# Altium PCB PCB1.PcbDoc
Units mil, origin at the board's own origin, x right, y up, seen from the top; angles counter-clockwise.
Board outline 6000 x 4000 mil, 2 copper layers (Top Layer, Bottom Layer); 16 components, 51 nets, 160 pads, 0 vias.
Unrouted connection lines stored in the file: 113.
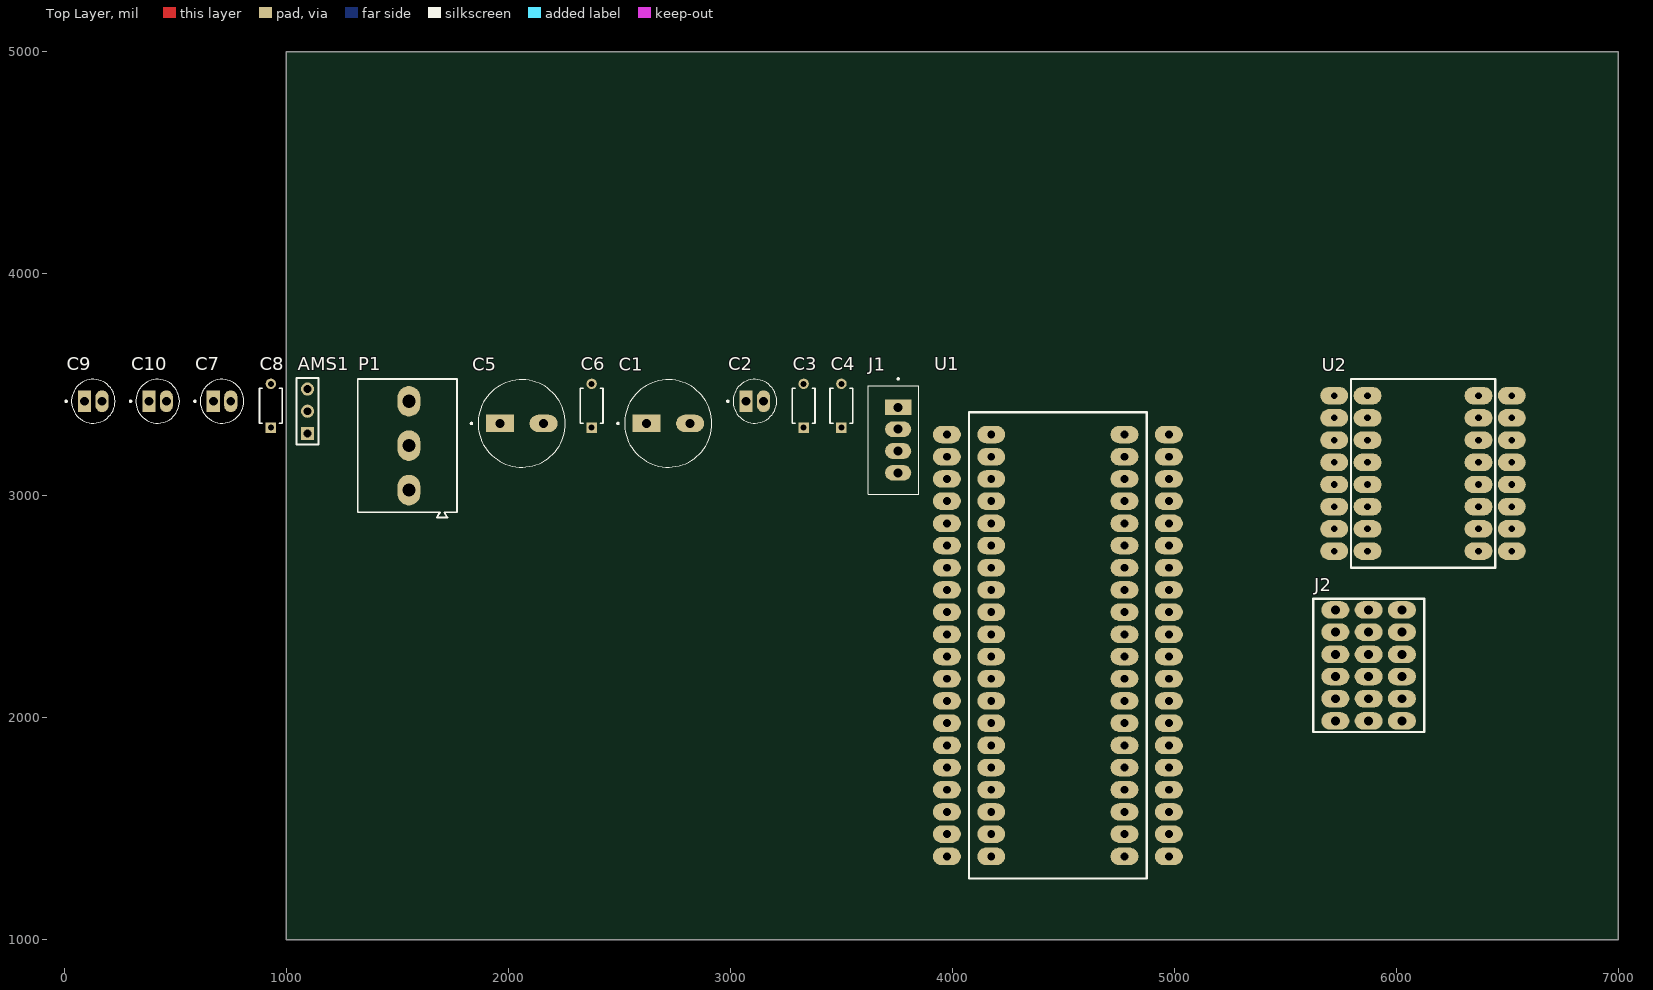
[diagram p0: Top Layer view]
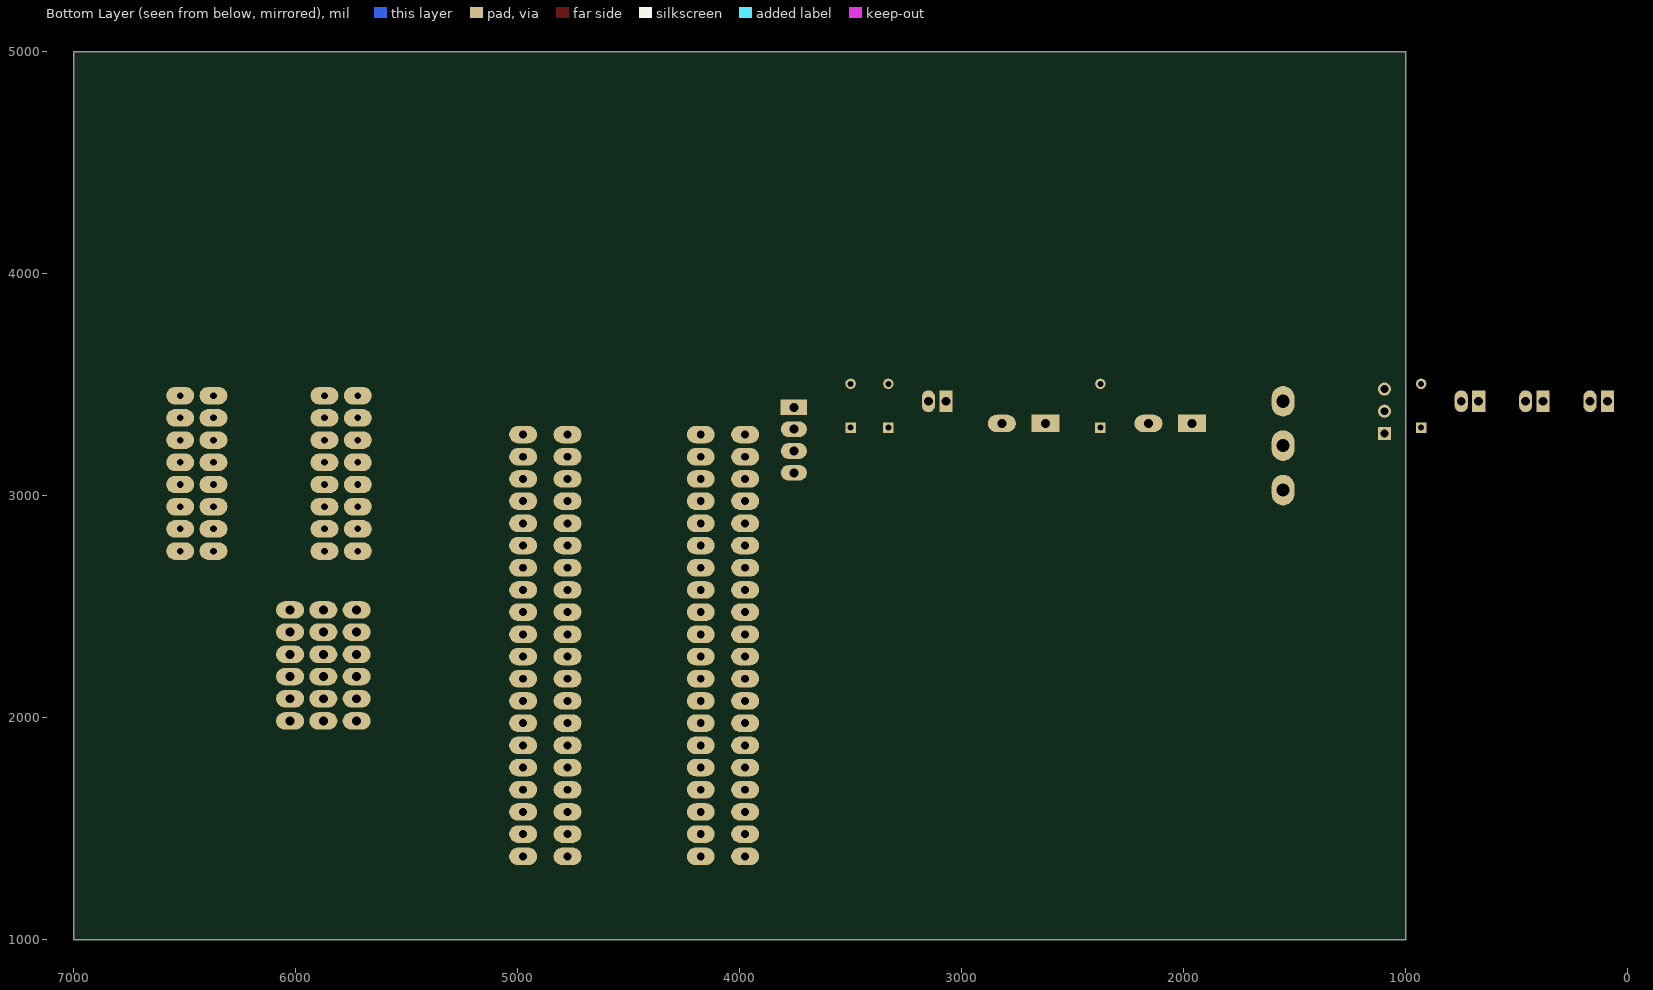
[diagram p1: Bottom Layer view, seen from below]

## Layer stack, top to bottom
Top Solder: solder mask 0.4, Solder Resist, Dk 3.5
Top Layer: signal copper 1.4
Dielectric 1: dielectric 12.6, FR-4, Dk 4.8
Bottom Layer: signal copper 1.4
Bottom Solder: solder mask 0.4, Solder Resist, Dk 3.5

## Board outline
1000,1000 7000,1000 7000,5000 1000,5000

## Design rules (kind name [scope] priority, off if disabled: settings)
Clearance [All] p1: gap=10 ignorepadtopadclearanceinfootprint=FALSE except(0: Arc-Hole Track-Hole SMDPad-Hole THPad-Hole Via-Hole Fill-Hole Poly-Hole Region-Hole Text-Hole)
PolygonConnect [All] p1: connectstyle=Relief reliefconductorwidth=10 reliefentries=4 polygonreliefangle="90 Angle" airgapwidth=10
RoutingVias [All] p1: holewidth=28 width=50 viastyle="Through Hole" minholewidth=28 minwidth=50 maxholewidth=28 maxwidth=50
SolderMaskExpansion [All] p1: expansion=4 istentingtop=FALSE
Width [All] p1: maxlimit=10 minlimit=10 preferedwidth=10
30 further rules are at their usual default settings.

## Components (designator, comment, footprint, x,y, rotation, side; value= is the part's Value field where it differs from the comment)
AMS1 "AMS1117-5.0" HDR1X3 1095,3280 r90 top
C1 "1000uF" *CAPPRD500W60D1000H1600_ECA1CM102(Primary) 2720,3325 r0 top
C2 "1000uF" *CAPPRD200W50D550H1250 3110,3425 r0 top
C3 "100nF" *CAPRR508W50L508T317H508 3330,3405 r90 top
C4 "100nF" *CAPRR508W50L508T317H508 3500,3405 r90 top
C5 "100uF" *CAPPRD500W60D1000H1600_ECA1CM102(Primary) 2060,3325 r0 top
C6 "100nF" *CAPRR508W50L508T317H508 2375,3405 r90 top
C7 "10uF" *CAPPRD200W50D550H1250 710,3425 r0 top
C8 "100nF" *CAPRR508W50L508T317H508 930,3405 r90 top
C9 "10uF" *CAPPRD200W50D550H1250 130,3425 r0 top
C10 "100nF" *CAPPRD200W50D550H1250 420,3425 r0 top
J1 "B4B-XH-A(LF)(SN)" *JST_B4B-XH-A(LF)(SN) 3735,3250 r90 top
J2 "CONNECTOR_SERVO_6X3*2.54" CONNECTOR_SERVO_6X3*2.54 5875,2235 r0 top
P1 "3X_connecteurbornier5.08_1" 3X_connecteur_bornier_5.08 1545,3225 r90 top
U1 "Connector_STM32F103" Connector_STM32F103 4475,2325 r0 top
U2 "CONNECTOR_DRV8825" CONNECTOR_DRV8825 6120,3100 r0 top

## Footprints (in the part's own frame and the unit in brackets; to place one, negate y for a bottom-side part, rotate by r counter-clockwise, add the part's x,y. Pads: shape width x height; smd on the part's side, far side on the other; paste and mask are expansions set on the pad)
3X_connecteur_bornier_5.08 [mm] "Horizontal Cable Entry with Rising Cage Clamp, pitch 5.08mm, 03p"
  oval 3.5x2.6 hole 1.5: 147(-5.08,-0.175) 148(0,-0.175) 149(5.08,-0.175)
  silkscreen extent -8.22,-5.68 7.62,5.68, body extent -8.22,-5.68 7.62,5.68, height 18.1
*CAPPRD200W50D550H1250 [mm]
  rect 1.5x2.5 hole 1.02: 1(-1,0)
  oval 1.5x2.5 hole 1.02: 2(1,0)
  silkscreen extent -3.2,-2.5 2.5,2.5, body extent -2.5,-2.5 2.5,2.5, height 12.5
*CAPPRD500W60D1000H1600_ECA1CM102(Primary) [mm]
  oval 3.2x2 hole 1.02: N(2.5,0)
  rect 3.2x2 hole 1.02: P(-2.5,0)
  silkscreen extent -5.85,-5 5,5, body extent -5,-5 5,5, height 16
*CAPRR508W50L508T317H508 [mm]
  rect 1.2x1.2 hole 0.7 paste-2539.97 mask+0: 1(-2.5,0)
  round 1.2 hole 0.7 paste-2539.97 mask+0: 2(2.5,0)
  silkscreen extent -2,-1.3 2,1.3, body extent -3.2,-1.4 3.2,1.4, height 0.25
*JST_B4B-XH-A(LF)(SN) [mm]
  rect 1.8x3 hole 1.02: 1(3.75,-0.525)
  oval 1.8x3 hole 1.02: 2(1.25,-0.525) 3(-1.25,-0.525) 4(-3.75,-0.525)
  silkscreen extent -6.2,-2.88 7.1,2.88, body extent -6.2,-2.87 6.2,2.88, height 7
CONNECTOR_DRV8825 [mm]
  oval 3.2x2 hole 0.762: 20(6.35,-8.89) 20(10.16,-8.89) 21(6.35,-6.35) 21(10.16,-6.35) 22(6.35,-3.81) 22(10.16,-3.81) 23(6.35,-1.27) 23(10.16,-1.27) 24(6.35,1.27) 24(10.16,1.27) 25(6.35,3.81) 25(10.16,3.81) 26(6.35,6.35) 26(10.16,6.35) 27(6.35,8.89) 27(10.16,8.89) 28(-10.16,-8.89) 28(-6.35,-8.89) 29(-10.16,-6.35) 29(-6.35,-6.35) 30(-10.16,-3.81) 30(-6.35,-3.81) 31(-10.16,-1.27) 31(-6.35,-1.27) 32(-10.16,1.27) 32(-6.35,1.27) 33(-10.16,3.81) 33(-6.35,3.81) 34(-10.16,6.35) 34(-6.35,6.35) 35(-10.16,8.89) 35(-6.35,8.89)
  silkscreen extent -8.25,-10.79 8.25,10.79, body extent -7.63,-10.16 7.63,10.16, height 8.75
CONNECTOR_SERVO_6X3*2.54 [mm]
  oval 3.2x2 hole 1.02: 17(0,1.27) 20(-3.81,-6.35) 21(-3.81,-3.81) 22(-3.81,-1.27) 23(-3.81,1.27) 24(-3.81,3.81) 25(-3.81,6.35) 26(0,-6.35) 27(0,-3.81) 28(0,-1.27) 29(0,3.81) 30(0,6.35) 31(3.81,-6.35) 32(3.81,-3.81) 33(3.81,-1.27) 34(3.81,1.27) 35(3.81,3.81) 36(3.81,6.35)
  silkscreen extent -6.35,-7.62 6.35,7.62, body extent -5.08,-7.62 5.08,7.62, height 8.6
Connector_STM32F103 [mm]
  oval 3.2x2 hole 0.9: 105(7.62,24.13) 105(12.7,24.13) 106(7.62,21.59) 106(12.7,21.59) 107(7.62,19.05) 107(12.7,19.05) 108(7.62,16.51) 108(12.7,16.51) 109(7.62,13.97) 109(12.7,13.97) 110(7.62,11.43) 110(12.7,11.43) 111(7.62,8.89) 111(12.7,8.89) 112(7.62,6.35) 112(12.7,6.35) 113(7.62,3.81) 113(12.7,3.81) 114(7.62,1.27) 114(12.7,1.27) 115(7.62,-1.27) 115(12.7,-1.27) 116(7.62,-3.81) 116(12.7,-3.81) 117(7.62,-6.35) 117(12.7,-6.35) 118(7.62,-8.89) 118(12.7,-8.89) 119(7.62,-11.43) 119(12.7,-11.43) 120(7.62,-13.97) 120(12.7,-13.97) 121(7.62,-16.51) 121(12.7,-16.51) 122(7.62,-19.05) 122(12.7,-19.05) 123(7.62,-21.59) 123(12.7,-21.59) 124(7.62,-24.13) 124(12.7,-24.13) 126(-12.7,24.13) 126(-7.62,24.13) 127(-12.7,21.59) 127(-7.62,21.59) 128(-12.7,19.05) 128(-7.62,19.05) 129(-12.7,16.51) 129(-7.62,16.51) 130(-12.7,13.97) 130(-7.62,13.97) 131(-12.7,11.43) 131(-7.62,11.43) 132(-12.7,8.89) 132(-7.62,8.89) 133(-12.7,6.35) 133(-7.62,6.35) 134(-12.7,3.81) 134(-7.62,3.81) 135(-12.7,1.27) 135(-7.62,1.27) 136(-12.7,-1.27) 136(-7.62,-1.27) 137(-12.7,-3.81) 137(-7.62,-3.81) 138(-12.7,-6.35) 138(-7.62,-6.35) 139(-12.7,-8.89) 139(-7.62,-8.89) 140(-12.7,-11.43) 140(-7.62,-11.43) 141(-12.7,-13.97) 141(-7.62,-13.97) 142(-12.7,-16.51) 142(-7.62,-16.51) 143(-12.7,-19.05) 143(-7.62,-19.05) 144(-12.7,-21.59) 144(-7.62,-21.59) 145(-12.7,-24.13) 145(-7.62,-24.13)
  silkscreen extent -10.16,-26.67 10.16,26.67, body extent -11.53,-27.08 11.47,30.73, height 15.1
HDR1X3 [mm] "Connector; Header; 3 Position"
  rect 1.5x1.5 hole 0.9: 1(0,0)
  round 1.5 hole 0.9: 2(2.54,0) 3(5.08,0)
  silkscreen extent -1.27,-1.27 6.35,1.27

## Part data
AMS1: library part "Header 3", "Header, 3-Pin", LatestRevisionDate=17-Jul-2002, LatestRevisionNote="Re-released for DXP Platform.", Publisher="Altium Limited"
C1 C5: library part ECA1CM102, "1000ÂµF 16V Aluminum Electrolytic Capacitors Radial, Can 2000 Hrs @ 85Â°C", Package="RADIAL-2 Panasonic", Availability="In Stock", Check_prices=https://www.snapeda.com/parts/ECA1CM102/Panasonic/view-part/?ref=eda, MF=Panasonic, MP=ECA1CM102, PRICE=None, SnapEDA_Link=https://www.snapeda.com/parts/ECA1CM102/Panasonic/view-part/?ref=snap
C2 C7 C9: library part UVR1E100MDD, "10 ÂµF 25 V Aluminum Electrolytic Capacitors Radial, Can - 2000 Hrs @ 85Â°C", Package="RADIAL-2 NICHICON", Availability="In Stock", Check_prices=https://www.snapeda.com/parts/UVR1E100MDD/Nichicon/view-part/?ref=eda, MF=Nichicon, MP=UVR1E100MDD, PRICE=None, SnapEDA_Link=https://www.snapeda.com/parts/UVR1E100MDD/Nichicon/view-part/?ref=snap
C3 C4 C6 C8 C10: library part SR215E104MARTR1, "SR Series 5.08x5.08 mm 100 nF 50 V Â±20% Tol. Z5U Radial Lead/SkyCapÂ®", Package="Radial AVX Interconnect / Elco", Availability="In Stock", Check_prices=https://www.snapeda.com/parts/SR215E104MARTR1/AVX/view-part/?ref=eda, MF=AVX, MP=SR215E104MARTR1, PRICE=None, SnapEDA_Link=https://www.snapeda.com/parts/SR215E104MARTR1/AVX/view-part/?ref=snap
J1: "HEADER, VERTICAL, 4WAY; Pitch Spacing: 2.5mm; No. of Contacts: 4Contacts; Gender: Header; Product Range: XH Series; Contact Termination Type: Through Hole; No. of Rows: 1Rows; Contact Plating: Tin Plated Contacts; Contact Material: Brass; SVHC: No SVHC (17-Dec-2015); Contact Resistance: 10mohm; Current Rating: 3A; Insulation Resistance: 1000Mohm; Operating Temperature Max: 85Â°C; Operating Temperature Min: -25Â°C; Voltage Rating VAC: 250V; Wire Size AWG Max: 22AWG; Wire Size AWG Min: 30AWG; Withstand Voltage: 1000V", Package=None, Availability="In Stock", Check_prices=https://www.snapeda.com/parts/B4B-XH-A%20%20(LF)(SN)/JST/view-part/?ref=eda, MF=JST, MP="B4B-XH-A  (LF)(SN)", PRICE=None, SnapEDA_Link=https://www.snapeda.com/parts/B4B-XH-A%20%20(LF)(SN)/JST/view-part/?ref=snap

## Nets (pads, with @x,y where several pads share a name; then routed paths per layer and width w, separated by ;. In a path a pad name is that pad's centre, name@x,y a point inside that pad or via, vN(x,y) a via of type N, cw(c..) or ccw(c..) an arc to the next point about the centre after c; other vN are vias at no path point)
3V3: U1.143
3V33: U1.105
3VB: U1.126
5V: AMS1.2 C7.1 C8.1 U1.107
12V: AMS1.1 C5.P C6.1 C9.1 C10.1 U2.27
A1: J1.3 U2.23
A2: J1.4 U2.22
B1: J1.2 U2.24
B2: J1.1 U2.25
DIR: U1.140 U2.28
ENA: U1.134 U2.35
FLT: U2.21
GND: AMS1.3 C1.N C2.2 C3.2 C4.2 C5.N C6.2 C7.2 C8.2 C9.2 C10.2 J2.31 J2.32 J2.33 J2.34 J2.35 J2.36 P1.149 U1.106 U1.144 U1.145 U2.20 U2.26
input_12V: P1.147
input_Vin: P1.148
M0: U1.135 U2.34
M1: U1.136 U2.33
M2: U1.137 U2.32
NetLED1_2: 
NetLED2_2: 
NetPWR_2: 
NetR1_1: 
PA_0: U1.130
PA_1: U1.131
PA_2: U1.132
PA_3: U1.133
PA_8: U1.120
PA_19: U1.119
PB_5: U1.112
PB_6: U1.111
PB_7: U1.110
PB_8: U1.109
PB_9: U1.108
PB_12: U1.124
PB_13: U1.123
PB_14: U1.122
PB_15: U1.121
PC_13: U1.127
PC_14: U1.128
PC_15: U1.129
RESET: U1.138 U2.31
RST: U1.142
SIGN1: J2.25 U1.113
SIGN2: J2.24 U1.114
SIGN3: J2.23 U1.115
SIGN4: J2.22 U1.116
SIGN5: J2.21 U1.117
SIGN6: J2.20 U1.118
SLEEP: U1.139 U2.30
STEP: U1.141 U2.29
Vin: C1.P C2.1 C3.1 C4.1 J2.17 J2.26 J2.27 J2.28 J2.29 J2.30